# EAGLE board arduino_uno_pcb _with_lcd (EAGLE 6.1)
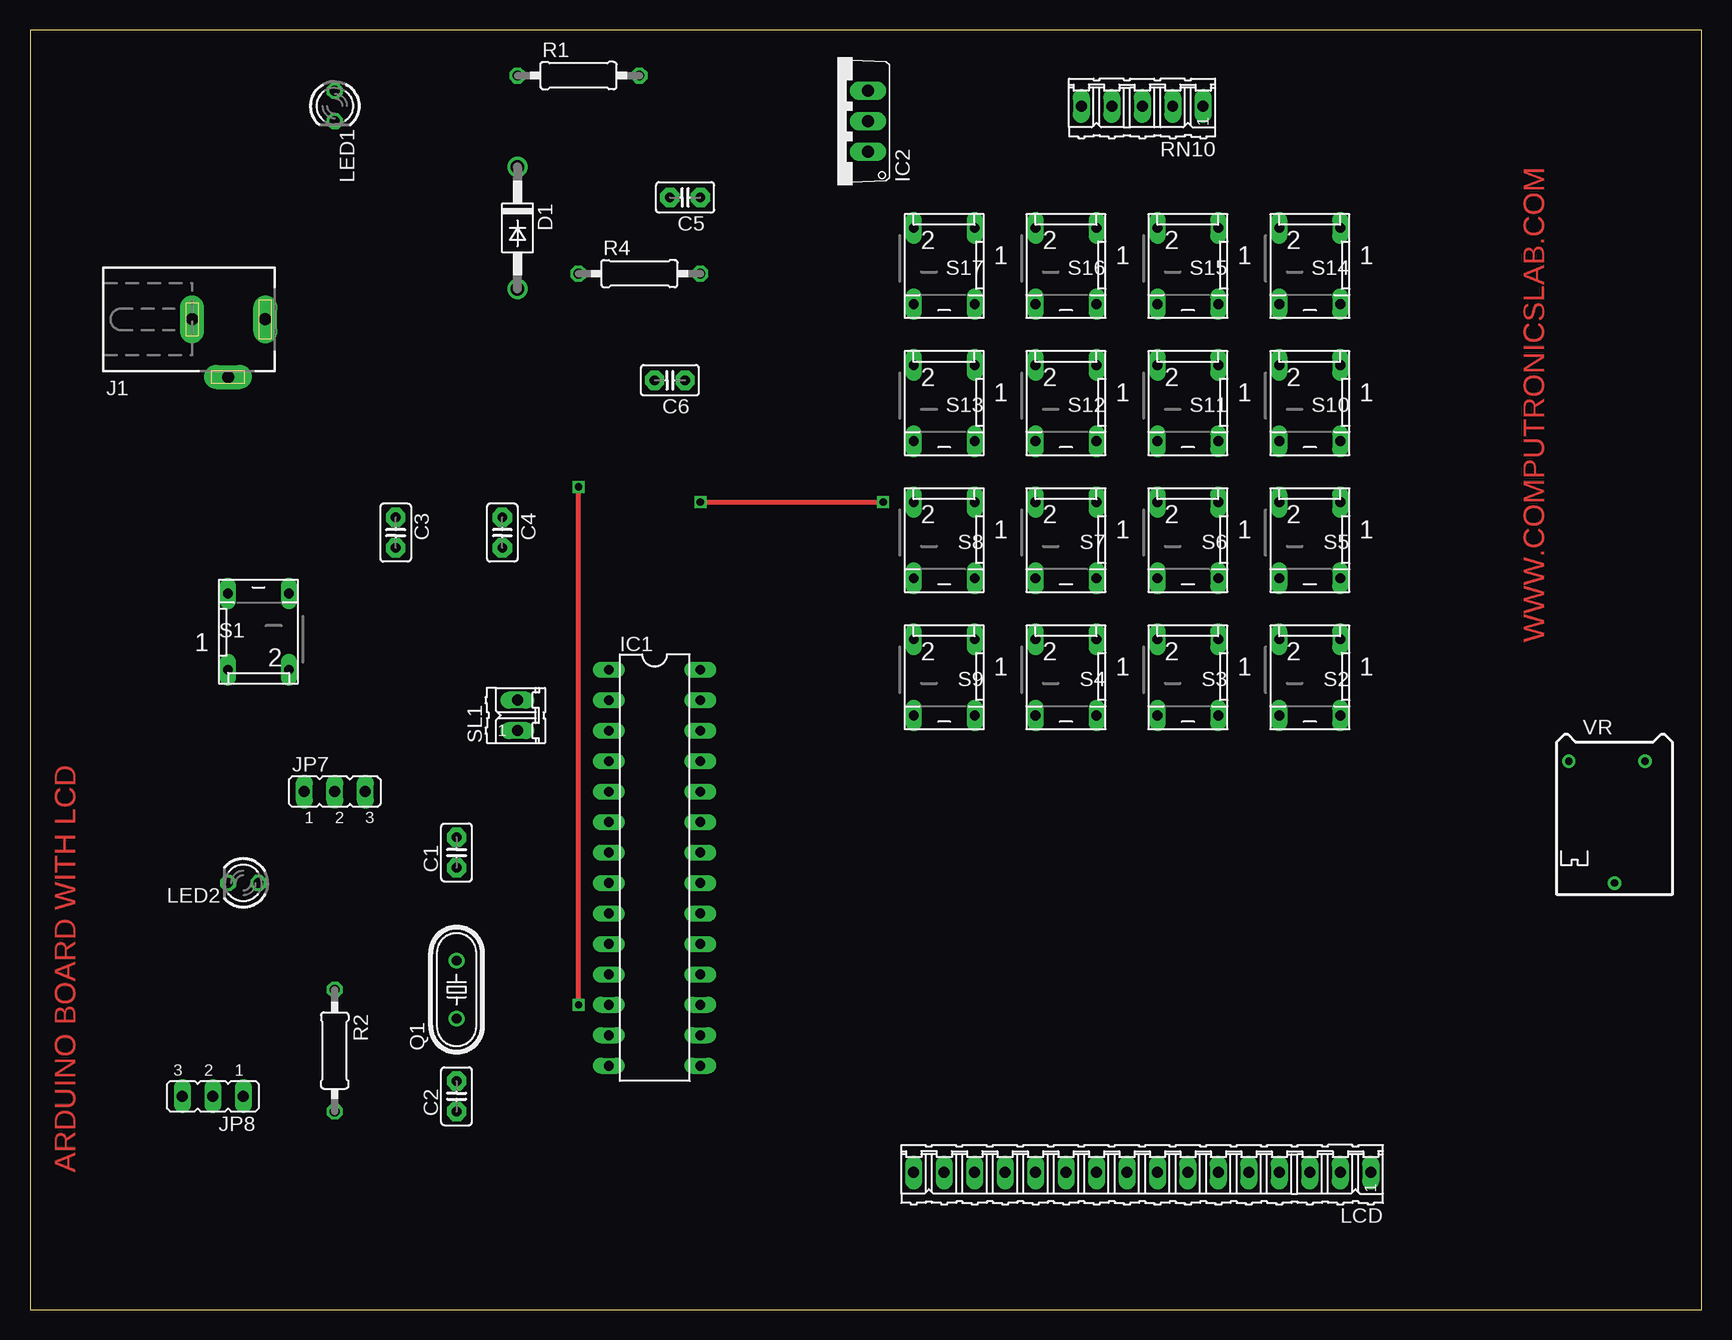
[diagram p0: board, top side]
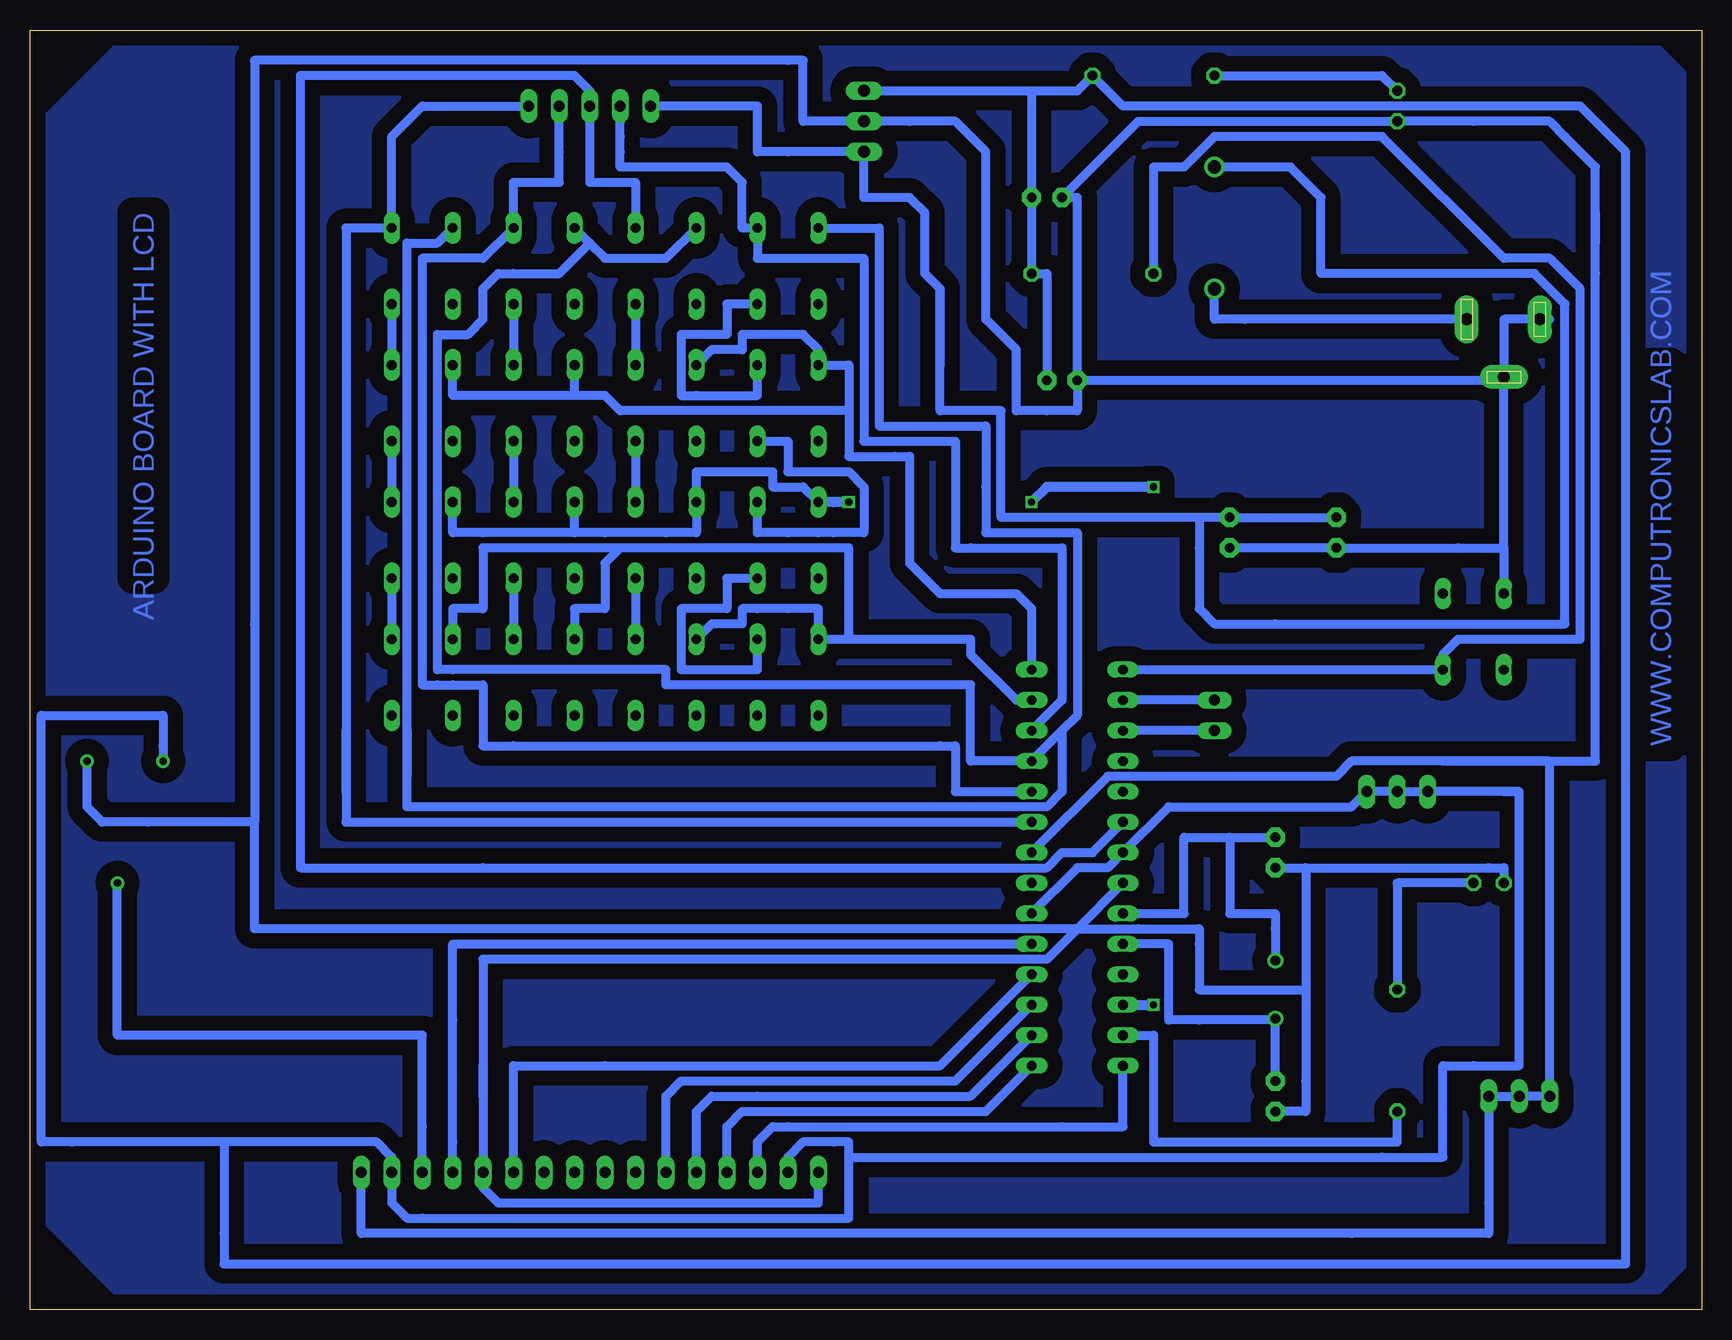
[diagram p1: board, bottom side, seen from below]

Size 139.37 x 106.67 mm. Coordinates in mm from the lower left corner, seen from the top.
Outline: 0,0 139.37,0 139.37,106.67 0,106.67 0,0
Copper layers (1*16): Top 0.035mm / dielectric 1.5mm / Bottom 0.035mm
Design rules: minimum track width 30mil, minimum drill 24mil, track to track 8mil, track to pad 8mil, pad to pad 8mil, via to via 8mil, smd to smd 8mil, copper to edge 40mil, drill to drill 8mil, minimum pad ring 10mil, minimum via ring 8mil, stop-mask expansion 4mil, vias tented up to drill 0mil, thermal gap 10mil

## Footprints (pad centres in the part's own frame; a part is rotated, then mirrored left to right if it is on the bottom)
C2.5-2 = drill 0.813 pad 1.6 octagon: 1 -1.27,0; 2 1.27,0
DO41-10 = drill 1.118: A 5.08,0; C -5.08,0
DIL28-3 = drill 0.813 long: 1 -16.51,-3.81; 2 -13.97,-3.81; 3 -11.43,-3.81; 4 -8.89,-3.81; 5 -6.35,-3.81; 6 -3.81,-3.81; 7 -1.27,-3.81; 8 1.27,-3.81; 9 3.81,-3.81; 10 6.35,-3.81; 11 8.89,-3.81; 12 11.43,-3.81; 13 13.97,-3.81; 14 16.51,-3.81; 15 16.51,3.81; 16 13.97,3.81; 17 11.43,3.81; 18 8.89,3.81; 19 6.35,3.81; 20 3.81,3.81; 21 1.27,3.81; 22 -1.27,3.81; 23 -3.81,3.81; 24 -6.35,3.81; 25 -8.89,3.81; 26 -11.43,3.81; 27 -13.97,3.81; 28 -16.51,3.81
TO220V = drill 1.016 long: 1 -2.54,-2.54; 2 0,-2.54; 3 2.54,-2.54
DCJ0303 = drill 1 pad 2 long: 1 0,3.1; 2 4.8,0; 3 0,-3
JP2 = drill 0.914 long: 1 -2.54,0; 2 0,0; 3 2.54,0
16P = drill 0.914 long: 1 -19.05,0; 2 -16.51,0; 3 -13.97,0; 4 -11.43,0; 5 -8.89,0; 6 -6.35,0; 7 -3.81,0; 8 -1.27,0; 9 1.27,0; 10 3.81,0; 11 6.35,0; 12 8.89,0; 13 11.43,0; 14 13.97,0; 15 16.51,0; 16 19.05,0
LED3MM = drill 0.813 octagon: A -1.27,0; K 1.27,0
HC49/S = drill 0.813: 1 -2.413,0; 2 2.413,0
0207/10 = drill 0.813 octagon: 1 -5.08,0; 2 5.08,0
05P = drill 0.914 long: 1 -5.08,0; 2 -2.54,0; 3 0,0; 4 2.54,0; 5 5.08,0
DP-02 = drill 0.813 long: 1 -2.54,-2.54; 2 2.54,-2.54; 3 2.54,3.81; 4 -2.54,3.81
02P = drill 0.914 long: 1 -1.27,0; 2 1.27,0
RTRIM64P = drill 0.61: 1 -2.54,-3.81; 2 7.62,0; 3 -2.54,2.54

## Placement (x,y rotation side)
C1  22pf  [C2.5-2]  35.56,38.1 90 top
C2  22pf  [C2.5-2]  35.56,17.78 90 top
C3  100UF  [C2.5-2]  30.48,64.77 270 top
C4  0.1uf  [C2.5-2]  39.37,64.77 270 top
C5  0.1uf  [C2.5-2]  54.61,92.71 180 top
C6  4.7uf  [C2.5-2]  53.34,77.47 180 top
D1  1N4007  [DO41-10]  40.64,90.17 270 top
IC1  ATMEGA328  [DIL28-3]  52.07,36.83 270 top
IC2  7805  [TO220V]  67.31,99.06 90 top
J1  [DCJ0303]  16.51,82.55 270 top
JP7  [JP2]  25.4,43.18 0 top
JP8  [JP2]  15.24,17.78 180 top
LCD  [16P]  92.71,11.43 180 top
LED1  [LED3MM]  25.4,100.33 270 top
LED2  [LED3MM]  17.78,35.56 180 top
Q1  16MHZ  [HC49/S]  35.56,26.67 90 top
R1  220R  [0207/10]  45.72,102.87 0 top
R2  330R  [0207/10]  25.4,21.59 270 top
R4  10K  [0207/10]  50.8,86.36 0 top
RN10  5pin  [05P]  92.71,100.33 180 top
S1  [DP-02]  19.05,55.88 0 top
S2  push switch  [DP-02]  106.68,53.34 180 top
S3  push switch  [DP-02]  96.52,53.34 180 top
S4  [DP-02]  86.36,53.34 180 top
S5  [DP-02]  106.68,64.77 180 top
S6  [DP-02]  96.52,64.77 180 top
S7  [DP-02]  86.36,64.77 180 top
S8  [DP-02]  76.2,64.77 180 top
S9  [DP-02]  76.2,53.34 180 top
S10  [DP-02]  106.68,76.2 180 top
S11  [DP-02]  96.52,76.2 180 top
S12  [DP-02]  86.36,76.2 180 top
S13  [DP-02]  76.2,76.2 180 top
S14  [DP-02]  106.68,87.63 180 top
S15  [DP-02]  96.52,87.63 180 top
S16  [DP-02]  86.36,87.63 180 top
S17  [DP-02]  76.2,87.63 180 top
SL1  [02P]  40.64,49.53 90 top
VR  100k  [RTRIM64P]  132.08,43.18 270 top

## Library data of the parts
C1-C6 = capacitor-wima
D1 = diode
IC1 = quantum-research-group; OC_FARNELL: unknown; OC_NEWARK: unknown
IC2 = linear
J1 = con-jack; OC_FARNELL: unknown; OC_NEWARK: unknown
JP7 JP8 = jumper
LCD RN10 SL1 = con-amp-quick; OC_FARNELL: unknown; OC_NEWARK: unknown
LED1 LED2 = led
Q1 = crystal; OC_FARNELL: 1667008; OC_NEWARK: unknown
R1 R2 R4 = rcl
S1-S17 = switch-dil; MPN: MCDP02; OC_FARNELL: 1255233; OC_NEWARK: 26M1095
VR = resistor

## Nets
N$1: C1.2 IC1.9 Q1.2
N$2: C2.2 IC1.10 Q1.1
N$3: D1.A J1.1
N$4: C5.1 C6.1 IC1.7 IC1.20 IC2.3 JP7.1 JP7.2 JP7.3 LCD.2 LCD.15 R1.2 R4.2 VR.1
N$5: C1.1 C2.1 C3.2 C4.2 C5.2 C6.2 IC1.8 IC1.22 IC2.2 J1.2 J1.3 JP8.1 JP8.2 JP8.3 LCD.1 LCD.5 LCD.16 LED1.K LED2.K S1.4 VR.3
N$6: LED1.A R1.1
N$7: C3.1 C4.1 D1.C IC2.1 RN10.5
N$10: IC1.26 RN10.4 S17.1
N$11: IC1.25 S14.2 S15.2 S16.2 S17.2
N$12: IC1.6 RN10.3 S16.1
N$13: IC1.13 R2.2
N$15: IC1.2 SL1.2
N$16: IC1.3 SL1.1
N$18: IC1.24 RN10.2 S15.1
N$21: IC1.27 S2.2 S3.2 S4.2 S9.2
N$22: LCD.3 VR.2
N$23: IC1.19 LCD.4
N$24: IC1.18 LCD.6
N$25: IC1.17 LCD.11
N$26: IC1.16 LCD.12
N$27: IC1.15 LCD.13
N$29: IC1.14 LCD.14
N$31: IC1.1 R4.1 S1.2
N$32: LED2.A R2.1
N$33: IC1.12 S5.2 S6.2 S7.2 S8.2
N$34: IC1.28 S10.2 S11.2 S12.2 S13.2
N$35: S2.1 S5.4
N$36: S5.1 S10.4
N$37: S10.1 S14.4
N$38: S6.1 S11.4
N$39: S11.1 S15.4
N$40: S12.1 S16.4
N$41: S13.1 S17.4
N$42: S8.1 S13.4
N$44: IC1.23 RN10.1 S14.1
N$49: S3.1 S6.4
N$50: S4.1 S7.4
N$51: S8.4 S9.1
N$52: S7.1 S12.4

## Tracks (layer width: path | path; a pad name or v marks a point on that pad's centre or on a via)
N$1
  Bottom 0.762: IC1.9 43.18,33.02 43.18,39.37 39.37,39.37 | 39.37,39.37 39.37,33.02 35.56,33.02 35.56,31.75 35.56,29.21 Q1.2 | 39.37,39.37 C1.2
N$2
  Bottom 0.762: C2.2 35.56,24.13 | 35.56,24.13 Q1.1 35.56,24.13 | IC1.10 44.45,30.48 44.45,24.13 41.91,24.13 35.56,24.13
N$3
  Bottom 0.762: D1.A 40.64,82.55 38.1,82.55 20.32,82.55 J1.1
N$4
  Bottom 0.762: C6.1 54.61,86.36 R4.2 C5.1 55.88,101.6 | IC2.3 55.88,101.6 | 55.88,101.6 52.07,101.6 R1.2 48.26,100.33 20.32,100.33 10.16,100.33 6.35,96.52 6.35,86.36 6.35,3.81 113.03,3.81 123.19,3.81 123.19,6.35 123.19,13.97 | IC1.20 52.07,36.83 49.53,36.83 IC1.7 44.45,41.91 29.21,41.91 JP7.3 JP7.2 JP7.1 16.51,43.18 | VR.1 128.27,46.99 128.27,49.53 138.43,49.53 138.43,13.97 135.89,13.97 123.19,13.97 | 123.19,13.97 110.49,13.97 109.22,12.7 LCD.2 109.22,10.16 109.22,8.89 107.95,7.62 106.68,7.62 71.12,7.62 71.12,12.7 | LCD.15 76.2,12.7 74.93,13.97 72.39,13.97 71.12,13.97 71.12,12.7 | 16.51,43.18 15.24,43.18 | 15.24,43.18 16.51,43.18 | 15.24,43.18 16.51,43.18 | 15.24,43.18 15.24,36.83 15.24,20.32 19.05,20.32 21.59,20.32 21.59,12.7 26.67,12.7 71.12,12.7
N$5
  Bottom 0.762: LED2.K 16.51,36.83 17.78,36.83 33.02,36.83 | C1.1 33.02,36.83 | C2.1 33.02,16.51 33.02,19.05 33.02,26.67 | 33.02,36.83 33.02,26.67 | LCD.16 73.66,8.89 100.33,8.89 101.6,10.16 LCD.5 101.6,17.78 | 120.65,40.64 120.65,36.83 120.65,31.75 52.07,31.75 | 120.65,40.64 129.54,40.64 | 129.54,40.64 133.35,40.64 134.62,41.91 VR.3 | IC1.8 52.07,31.75 | 101.6,20.32 101.6,17.78 | 101.6,17.78 101.6,20.32 | 101.6,20.32 101.6,29.21 85.09,29.21 54.61,29.21 52.07,31.75 | 101.6,20.32 101.6,17.78 | 33.02,26.67 41.91,26.67 41.91,30.48 41.91,31.75 46.99,31.75 52.07,31.75 | J1.2 16.51,78.74 16.51,82.55 12.7,82.55 J1.3 | 20.32,63.5 16.51,63.5 | 16.51,63.5 S1.4 | 20.32,63.5 C3.2 C4.2 | 16.51,63.5 16.51,77.47 | 20.32,63.5 16.51,63.5 | 16.51,77.47 J1.2 | C6.2 52.07,74.93 54.61,74.93 57.15,74.93 57.15,80.01 59.69,82.55 59.69,86.36 59.69,96.52 62.23,99.06 66.04,99.06 68.58,99.06 IC2.2 71.12,99.06 74.93,99.06 74.93,104.14 76.2,104.14 120.65,104.14 120.65,57.15 120.65,40.64 | C6.2 52.07,78.74 52.07,92.71 C5.2 46.99,99.06 LED1.K 19.05,99.06 12.7,99.06 11.43,97.79 8.89,95.25 8.89,91.44 | C6.2 16.51,77.47 | 16.51,77.47 J1.2 | IC1.22 49.53,44.45 30.48,44.45 29.21,45.72 21.59,45.72 | 21.59,45.72 12.7,45.72 12.7,43.18 12.7,36.83 JP8.3 JP8.2 JP8.1 17.78,8.89 17.78,6.35 29.21,6.35 111.76,6.35 LCD.1 | 8.89,88.9 8.89,91.44 | 8.89,91.44 8.89,88.9 | 8.89,88.9 8.89,86.36 8.89,45.72 21.59,45.72 | 8.89,88.9 8.89,91.44 | 120.65,40.64 129.54,40.64
N$6
  Bottom 0.762: LED1.A 26.67,102.87 R1.1
N$7
  Bottom 0.762: RN10.5 78.74,100.33 78.74,96.52 76.2,96.52 IC2.1 69.85,92.71 66.04,92.71 64.77,91.44 64.77,86.36 63.5,85.09 | C3.1 C4.1 41.91,66.04 | D1.C 34.29,95.25 31.75,92.71 31.75,86.36 13.97,86.36 11.43,83.82 11.43,57.15 35.56,57.15 40.64,57.15 41.91,58.42 41.91,63.5 41.91,66.04 | 63.5,78.74 63.5,85.09 | 63.5,78.74 63.5,74.93 58.42,74.93 58.42,66.04 41.91,66.04 | 63.5,78.74 63.5,80.01 63.5,85.09 | 63.5,85.09 63.5,78.74
N$8
  pour Bottom (isolate 1.27): 7.62,0 5.08,0 0,5.08 0,101.6 5.08,106.68 130.81,106.68 138.43,99.06 139.7,97.79 139.7,8.89 130.81,0
N$10
  Bottom 0.762: IC1.26 53.34,50.8 53.34,63.5 60.96,63.5 62.23,63.5 62.23,72.39 69.85,72.39 69.85,87.63 78.74,87.63 S17.1 80.01,90.17 80.01,93.98 81.28,95.25 86.36,95.25 90.17,95.25 90.17,96.52 90.17,97.79 90.17,99.06 RN10.4
N$11
  Bottom 0.762: S16.2 86.36,87.63 91.44,87.63 92.71,88.9 | S15.2 92.71,88.9 | 53.34,48.26 52.07,49.53 52.07,64.77 59.69,64.77 59.69,68.58 59.69,73.66 68.58,73.66 68.58,90.17 S17.2 | 53.34,48.26 IC1.25 60.96,45.72 60.96,52.07 62.23,52.07 85.09,52.07 86.36,52.07 86.36,53.34 104.14,53.34 105.41,53.34 105.41,54.61 105.41,80.01 105.41,81.28 102.87,81.28 101.6,82.55 101.6,85.09 100.33,86.36 99.06,86.36 95.25,86.36 92.71,88.9 | S14.2 105.41,88.9 107.95,88.9 107.95,48.26 | 107.95,44.45 107.95,48.26 | 107.95,44.45 107.95,41.91 99.06,41.91 54.61,41.91 53.34,43.18 53.34,48.26 | 107.95,44.45 107.95,48.26 | 107.95,48.26 107.95,44.45
N$12
  Bottom 0.762: IC1.6 50.8,38.1 53.34,38.1 54.61,36.83 101.6,36.83 116.84,36.83 116.84,46.99 116.84,102.87 93.98,102.87 92.71,101.6 RN10.3 92.71,99.06 92.71,96.52 92.71,95.25 92.71,93.98 88.9,93.98 S16.1
N$13
  Bottom 0.762: R2.2 25.4,15.24 25.4,13.97 27.94,13.97 39.37,13.97 45.72,13.97 45.72,22.86 IC1.13
N$15
  Bottom 0.762: SL1.2 IC1.2
N$16
  Bottom 0.762: SL1.1 IC1.3
N$18
  Bottom 0.762: IC1.24 62.23,43.18 62.23,46.99 63.5,46.99 99.06,46.99 101.6,46.99 101.6,52.07 104.14,52.07 105.41,52.07 106.68,52.07 106.68,53.34 106.68,87.63 101.6,87.63 S15.1 99.06,93.98 95.25,93.98 95.25,96.52 RN10.2
N$21
  Bottom 0.762: IC1.27 57.15,50.8 60.96,54.61 60.96,55.88 71.12,55.88 | 71.12,55.88 S9.2 73.66,58.42 76.2,58.42 78.74,58.42 80.01,58.42 80.01,57.15 82.55,57.15 S4.2 | S3.2 93.98,58.42 91.44,58.42 91.44,62.23 90.17,63.5 88.9,63.5 | 88.9,63.5 78.74,63.5 71.12,63.5 71.12,62.23 71.12,55.88 | S2.2 104.14,58.42 101.6,58.42 101.6,63.5 99.06,63.5 88.9,63.5
N$22
  Bottom 0.762: VR.2 132.08,22.86 111.76,22.86 109.22,22.86 106.68,22.86 106.68,15.24 106.68,12.7 LCD.3
N$23
  Bottom 0.762: IC1.19 87.63,30.48 104.14,30.48 104.14,24.13 104.14,13.97 LCD.4
N$24
  Bottom 0.762: IC1.18 63.5,20.32 91.44,20.32 99.06,20.32 99.06,17.78 99.06,12.7 LCD.6
N$25
  Bottom 0.762: IC1.17 62.23,19.05 80.01,19.05 85.09,19.05 86.36,17.78 86.36,12.7 LCD.11
N$26
  Bottom 0.762: IC1.16 60.96,17.78 78.74,17.78 82.55,17.78 83.82,16.51 83.82,12.7 LCD.12
N$27
  Bottom 0.762: IC1.15 59.69,16.51 77.47,16.51 80.01,16.51 81.28,15.24 81.28,12.7 LCD.13
N$29
  Bottom 0.762: IC1.14 48.26,15.24 53.34,15.24 76.2,15.24 77.47,15.24 78.74,13.97 78.74,12.7 LCD.14
N$31
  Bottom 0.762: IC1.1 S1.2 21.59,54.61 20.32,55.88 19.05,55.88 10.16,55.88 10.16,85.09 12.7,87.63 16.51,87.63 26.67,97.79 40.64,97.79 43.18,95.25 45.72,95.25 R4.1
N$32
  Bottom 0.762: R2.1 25.4,35.56 LED2.A
N$33  (via drill 0.6)
  Top 0.406: v45.72,25.4 v45.72,68.58 | v55.88,67.31 v71.12,67.31
  Bottom 0.762: S8.2 74.93,68.58 77.47,68.58 77.47,69.85 78.74,69.85 81.28,69.85 83.82,69.85 S7.2 83.82,64.77 86.36,64.77 91.44,64.77 | 91.44,64.77 93.98,64.77 S6.2 | S5.2 104.14,64.77 101.6,64.77 91.44,64.77
  Bottom 0.813: IC1.12 v45.72,25.4 | v45.72,68.58 54.61,68.58 v55.88,67.31 | v71.12,67.31 72.39,67.31 S8.2
N$34
  Bottom 0.762: IC1.28 55.88,58.42 57.15,59.69 63.5,59.69 66.04,62.23 66.04,67.31 66.04,71.12 67.31,71.12 71.12,71.12 71.12,74.93 | 71.12,74.93 71.12,78.74 S13.2 73.66,80.01 74.93,81.28 76.2,81.28 78.74,81.28 80.01,81.28 80.01,80.01 82.55,80.01 S12.2 | 91.44,76.2 90.17,74.93 71.12,74.93 | 91.44,76.2 93.98,76.2 S11.2 | S10.2 104.14,76.2 101.6,76.2 91.44,76.2
N$35
  Bottom 0.762: S5.4 S2.1
N$36
  Bottom 0.762: S10.4 S5.1
N$37
  Bottom 0.762: S14.4 S10.1
N$38
  Bottom 0.762: S11.4 S6.1
N$39
  Bottom 0.762: S15.4 S11.1
N$40
  Bottom 0.762: S16.4 S12.1
N$41
  Bottom 0.762: S13.1 78.74,76.2 83.82,76.2 85.09,76.2 85.09,77.47 85.09,81.28 81.28,81.28 81.28,83.82 S17.4
N$42
  Bottom 0.762: S8.1 78.74,64.77 76.2,64.77 73.66,64.77 72.39,64.77 69.85,64.77 69.85,68.58 71.12,69.85 72.39,69.85 76.2,69.85 76.2,72.39 S13.4
N$44
  Bottom 0.762: IC1.23 102.87,40.64 113.03,40.64 113.03,43.18 | 113.03,43.18 113.03,48.26 | 113.03,48.26 113.03,43.18 | 113.03,48.26 113.03,90.17 110.49,90.17 S14.1 109.22,97.79 106.68,100.33 RN10.1 | 113.03,48.26 113.03,43.18
N$49
  Bottom 0.762: S6.4 S3.1
N$50
  Bottom 0.762: S7.4 S4.1
N$51
  Bottom 0.762: S9.1 78.74,53.34 81.28,53.34 83.82,53.34 85.09,53.34 85.09,54.61 85.09,58.42 81.28,58.42 81.28,60.96 S8.4
N$52
  Bottom 0.762: S12.4 S7.1

## Text on the board
Top: WWW.COMPUTRONICSLAB.COM | ARDUINO BOARD WITH LCD
Bottom: ARDUINO BOARD WITH LCD | WWW.COMPUTRONICSLAB.COM